# Altium PCB 2014_AlimBeaconEye.PCBDOC
Units mm, origin at the board's own origin, x right, y up, seen from the top; angles counter-clockwise.
Board outline 65.25 x 78.25 mm, 4 copper layers (1-TOP, 2-GND, 3-SIGNAL, 4-BOTTOM); 20 components, 8 nets, 37 pads, 0 vias.
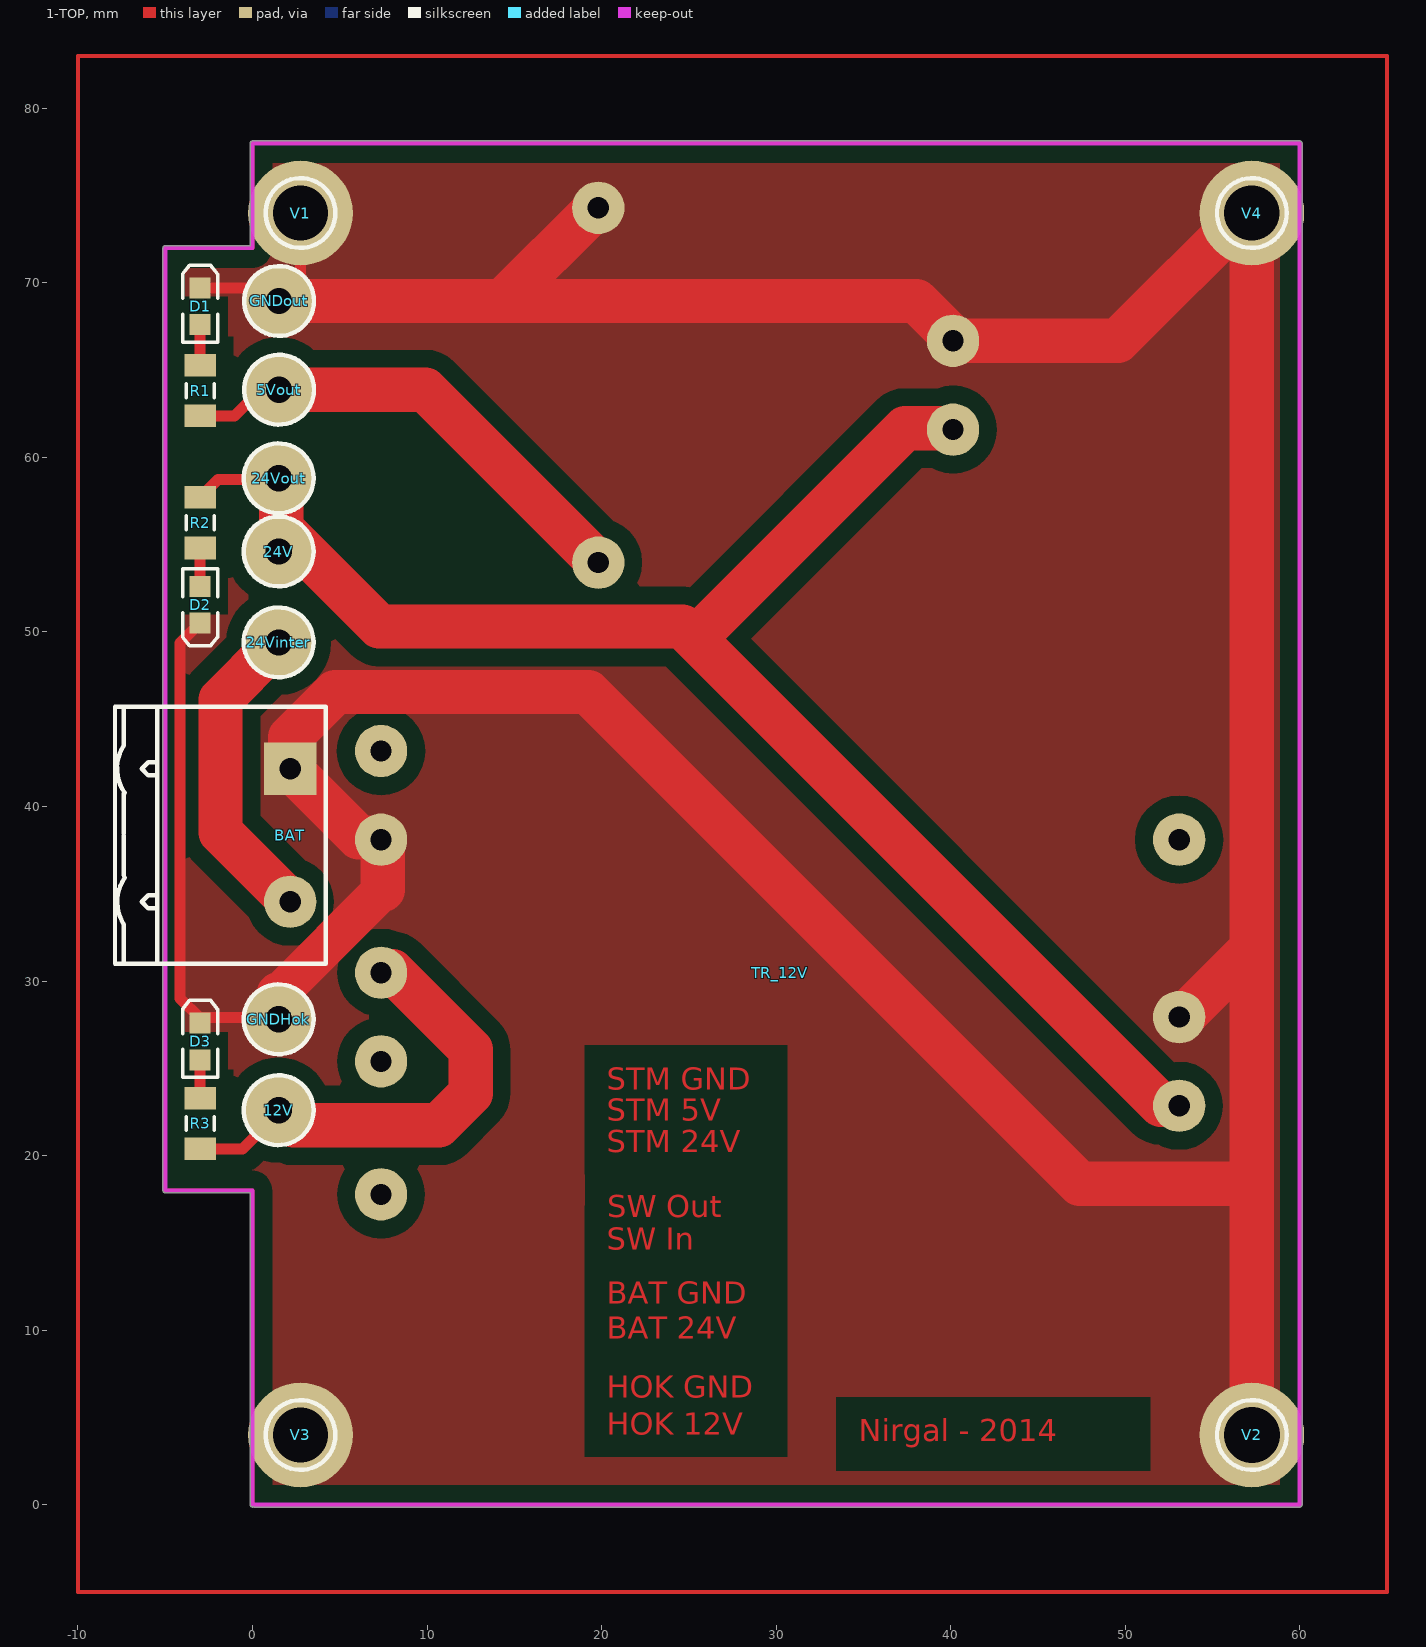
[diagram p0: 1-TOP view]
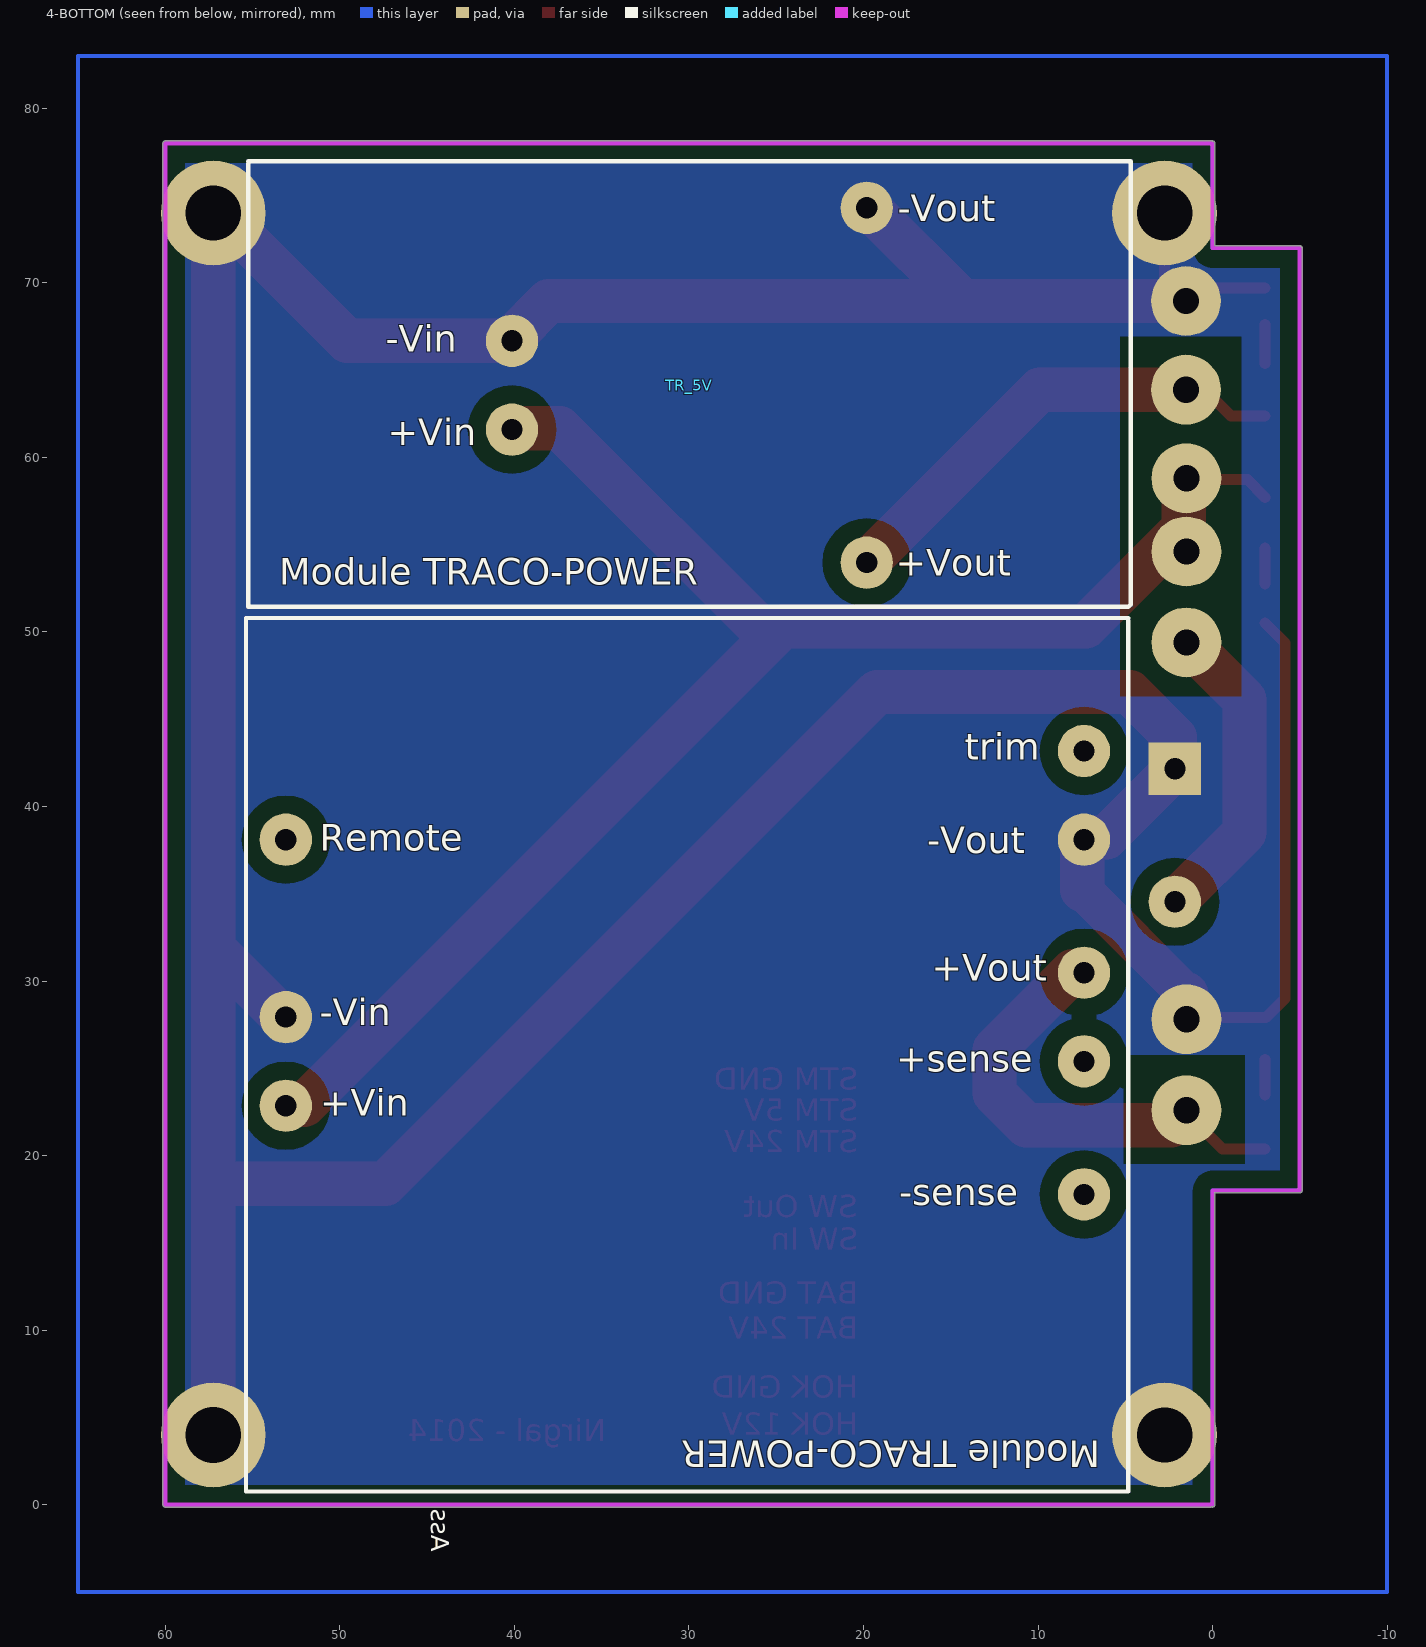
[diagram p1: 4-BOTTOM view, seen from below]
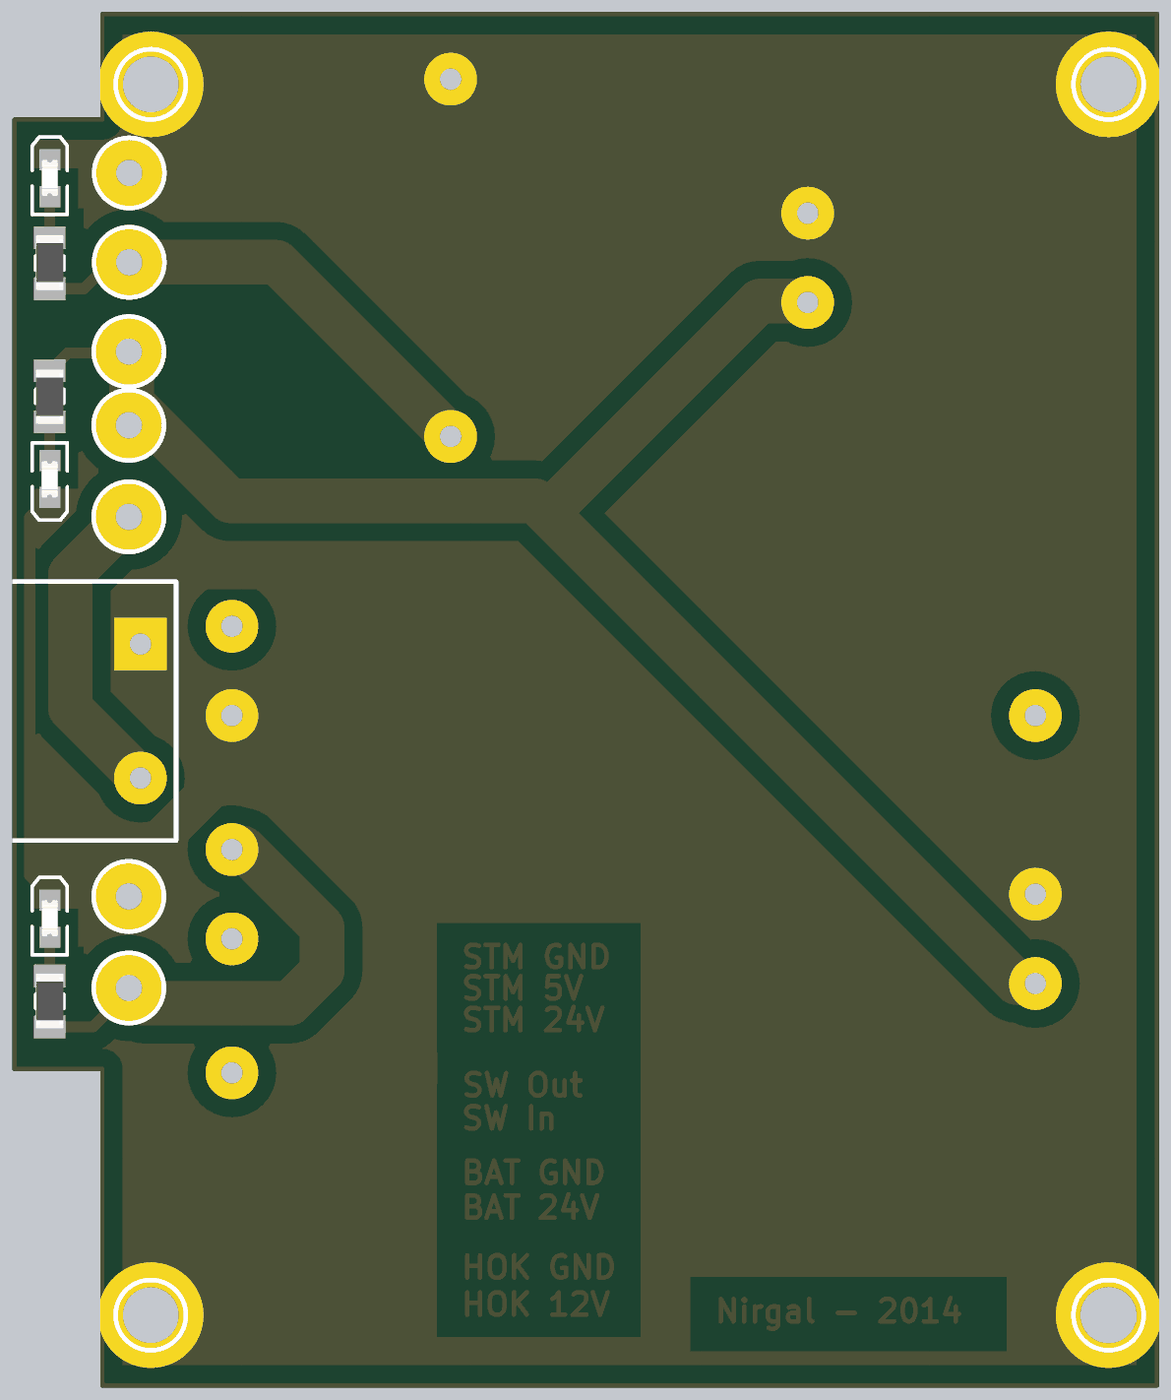
[diagram p2: 3D render of the assembled board from above, using the file's embedded part models]

## Layer stack, top to bottom
1-TOP: signal copper 0.0356
Dielectric: prepreg 0.32, FR-4, Dk 4.8
2-GND: signal copper 0.0356
Dielectric: core 0.32, FR-4, Dk 4.8
3-SIGNAL: signal copper 0.0356
Dielectric: prepreg 0.32, FR-4, Dk 4.8
4-BOTTOM: signal copper 0.0356

## Board outline
-5.127,18 ccw(c-5,18) -5,17.873 -0.127,17.873 -0.127,0 ccw(c0,0) 0.051,-0.117 ccw(c0.102,0) 0.102,-0.127 60,-0.127 ccw(c60,0) 60.127,0 60.127,78 ccw(c60,78) 60,78.127 0,78.127 ccw(c0,78) -0.127,78 -0.127,72.127 -5,72.127 ccw(c-5,72) -5.127,72

## Design rules (kind name [scope] priority, off if disabled: settings)
Clearance Clearance_1 [InNamedPolygon('4-GND') Or  InNamedPolygon('1-GND')] p1: gap=1.016
Clearance [All] p2: gap=0.381
FabricationTestPointUsage TestPointUsage [All] p1: valid=0 allowmultiple=FALSE
FabricationTestpoint Testpoint [All] p1: side=3 testpointundercomponent=TRUE minsize=1.016 maxsize=2.54 preferedsize=1.524 minholesize=0 maxholesize=1.016 preferedholesize=0.813 testpointgrid=0.025 allowsidetop=TRUE allowsidebottom=TRUE usegrid=TRUE gridtolerance=0
PlaneClearance [All] p1: clearance=0.254
PlaneConnect [All] p1: planeconnectstyle=Direct reliefexpansion=0.635 reliefentries=4 reliefconductorwidth=0.305 reliefairgap=0.381
PolygonConnect [All] p1: connectstyle=Direct reliefconductorwidth=0.254 reliefentries=4 polygonreliefangle="90 Angle"
RoomDefinition 2014_AlimBeaconEye [InComponentClass('2014_AlimBeaconEye')] p1: confinementstyle=ConfineIn formatcopy=TRUE lockcomponents=FALSE outline 79.136,0.914 299.126,0.914 299.126,54.762 79.136,54.762
RoutingLayers RoutingLayers_1 [All] p1: top layer_v5=TRUE mid layer 1_v5=FALSE mid layer 2_v5=FALSE bottom layer_v5=TRUE
RoutingLayers [All] p2: top layer_v5=TRUE mid layer 1_v5=FALSE mid layer 2_v5=FALSE bottom layer_v5=TRUE
RoutingVias [All] p1: holewidth=0.711 width=1.27 viastyle="Through Hole" minholewidth=0.711 minwidth=1.27 maxholewidth=0.711 maxwidth=1.27
SilkscreenOverComponentPads [All] p1: minsilkscreentomaskgap=0.254
SolderMaskExpansion [All] p1: expansion=0
Width [All] p1: maxlimit=3.81 minlimit=0.305 preferedwidth=0.381
22 further rules are at their usual default settings.

## Components (designator, comment, footprint, x,y, rotation, side; value= is the part's Value field where it differs from the comment)
5Vout "Pad_M3" M3x6mm#1 1.524,63.881 r0 top
12V "Pad_M3" M3x6mm#1 1.5,22.606 r0 top
24V "Pad_M3" M3x6mm#1 1.5,54.61 r0 top
24Vinter "Pad_M3" M3x6mm#1 1.5,49.403 r90 top
24Vout "Pad_M3" M3x6mm#1 1.5,58.801 r0 top
BAT "0 - 24V" BORNIER2_FEM_COUDE 2.159,42.164 r270 top
D1 "Verte" LED_0805 -3,68.656 r90 top
D2 "Orange" LED_0805 -3,51.562 r270 top
D3 "Jaune" LED_0805 -3,26.543 r90 top
GNDHok "Pad_M3" M3x6mm#1 1.5,27.813 r0 top
GNDout "Pad_M3" M3x6mm#1 1.524,68.961 r0 top
R1 "1k" R1206_N -3,63.83 r90 top
R2 "4.7k" R1206_N -3,56.261 r270 top
R3 "4.7k" R1206_N -3,21.844 r90 top
TR_5V "TRACO_Single_5V" TRACO_Single 40.132,64.135 r180 bottom
TR_12V "TRACO_12V_5A" TRACO_SIMPLE_12V_5A 4.826,50.8 r0 top
V1 "Pad_M3" M3x6mm#2 2.75,74 r0 top
V2 "Pad_M3" M3x6mm#3 57.25,4 r0 top
V3 "Pad_M3" M3x6mm#2 2.75,4 r0 top
V4 "Pad_M3" M3x6mm#2 57.25,74 r0 top

## Footprints (in the part's own frame and the unit in brackets; to place one, negate y for a bottom-side part, rotate by r counter-clockwise, add the part's x,y. Pads: shape width x height; smd on the part's side, far side on the other; paste and mask are expansions set on the pad)
BORNIER2_FEM_COUDE [mm] "Connector; Header; 2 Position; Right Angle; Female; Pin Spacing=5.08mm Green"
  rect 3x3 hole 1.219: 1(0,0)
  round 3 hole 1.219: 2(7.62,0)
  silkscreen extent -3.56,-10.03 11.18,2.03
LED_0805 [mm] "SM LED; 2 Flat Leads"
  rect 1.2x1.2 smd: 1(-1.05,0) 2(1.05,0)
  silkscreen extent -2.05,-1 2.35,1, body extent -1.05,-0.64 1.06,0.64, height 1.2
M3x6mm#1 [mm] "Vis M3 X 6mm"
  round 4 hole 1.5: 1(0,0)
  silkscreen extent -2,-2 2,2
M3x6mm#2 [mm] "Vis M3 X 6mm"
  round 6 hole 3.175: 1(0,0)
  silkscreen extent -2,-2 2,2
M3x6mm#3 [mm] "Vis M3 X 6mm"
  round 6 hole 3.2: 1(0,0)
  silkscreen extent -2,-2 2,2
R1206_N [mm] "Chip Resistor, Body 3.2x1.6mm, IPC Medium Density"
  rect 1.3x1.8 smd: 1(-1.45,0) 2(1.45,0)
  silkscreen extent -0.4,-0.8 0.4,0.8, body extent -1.68,-0.87 1.68,0.87, height 0.71
TRACO_SIMPLE_12V_5A [mm] "DoubleTRACO-POWER module"
  round 3 hole 1.219: 1(48.26,-27.94) 2(48.26,-22.86) 3(48.26,-12.7) 4(2.54,-33.02) 5(2.54,-25.4) 6(2.54,-20.32) 7(2.54,-12.7) 8(2.54,-7.62)
  body extent -0.13,-50.04 50.67,0.13
TRACO_Single [mm] "Single TRACO-POWER module"
  round 3 hole 1.219: 1(0,2.54) 2(0,-2.54) 3(20.32,10.16) 4(20.32,-10.16)
  silkscreen extent -15.11,-12.7 35.43,12.83, body extent -15.24,-12.83 35.56,12.95, height 10

## Part data
5Vout 12V 24V 24Vinter 24Vout GNDHok GNDout V1 V2 V3 V4: library part "Vis M3 X 6mm _TORX_Tête 6mm", "Vis M3 X 6mm _TORX_Tête 6mm"
BAT: library part BORNIER2, "Terminal blocks, 2 pins, pitch=5mm"
D1 D2 D3: library part LED, "Typical LED"
R1 R2 R3: library part Resistor, "Resistor"
TR_5V: library part TRACO_Single

## Nets (pads, with @x,y where several pads share a name; then routed paths per layer and width w, separated by ;. In a path a pad name is that pad's centre, name@x,y a point inside that pad or via, vN(x,y) a via of type N, cw(c..) or ccw(c..) an arc to the next point about the centre after c; other vN are vias at no path point)
5V: 5Vout.1 R1.1 TR_5V.4 | length 26.4
  1-TOP w0.635: R1.1 -1.044,62.38 5Vout.1@0.61,64.033
  1-TOP w2.54: 5Vout.1 9.906,63.881 TR_5V.4@19.609,54.178
12V: 12V.1 R3.1 TR_12V.6 | length 26.4
  1-TOP w0.635: R3.1 -0.561,20.394 12V.1@1.194,22.149
  1-TOP w2.54: 12V.1 2.364,21.742 10.668,21.742 12.497,23.571 12.497,26.06 8.001,30.556 TR_12V.6@7.442,30.556
24V: 24V.1 24Vout.1 R2.1 TR_5V.2 TR_12V.1 | length 91.9
  1-TOP w0.635: R2.1 -1.986,58.725 24Vout.1@0.965,58.725
  1-TOP w2.54: 24Vout.1@1.676,58.674 1.651,58.649 1.651,55.931 7.264,50.317 24.613,50.317 51.994,22.936 52.045,22.936 52.045,22.911 TR_12V.1@53.035,22.911 ; 25.324,49.606 37.389,61.671 TR_5V.2@40.056,61.671
24VIN: 24Vinter.1 BAT.2 | length 17.5
  1-TOP w2.54: 24Vinter.1@1.219,49.174 -1.829,46.126 -1.829,38.532 BAT.2
GND: BAT.1 D1.2 D2.2 D3.2 GNDHok.1 GNDout.1 TR_5V.1 TR_5V.3 TR_12V.2 TR_12V.7 V1.1 V2.1 V3.1 V4.1 | length 555.8
  1-TOP w0.229: 0,0 0,18 -5,18 -5,72 0,72 0,78 60,78 60,0 0.102,0 0.025,0.076 ; 0.025,77.978 0.047,78
  1-TOP w0.635: D2.2 -4.14,49.372 -4.14,29.007 -3.048,27.915 GNDHok.1@1.448,27.915 ; D1.2 1.566,69.706 GNDout.1@1.93,69.342 ; GNDout.1@1.829,69.19 2.75,70.111 V1.1
  1-TOP w2.286: GNDHok.1@1.5,29.262 7.468,35.23
  1-TOP w2.54: GNDHok.1 GNDHok.1@1.5,29.262 ; GNDout.1@1.93,68.961 14.351,68.961 ; TR_12V.7@7.341,38.227 6.096,38.227 BAT.1 2.159,43.967 4.75,46.558 19.228,46.558 47.396,18.39 56.769,18.39 ; 7.468,35.23 TR_12V.7@7.468,38.252 ; TR_5V.3@19.66,74.27 14.351,68.961 ; TR_5V.1 49.581,66.675 V4.1@57.175,74.27 ; TR_5V.1@40.132,66.853 38.024,68.961 14.351,68.961 ; TR_12V.2@53.721,28.346 57.25,31.875 ; V2.1@55.953,3.708 57.25,5.005 57.25,31.875 ; V4.1 57.25,31.875
NetD1_1: D1.1 R1.2 | length 2.2
  1-TOP w0.635: R1.2@-3,65.377 D1.1
NetD2_1: D2.1 R2.2 | length 2.1
  1-TOP w0.635: D2.1@-3,52.759 R2.2
NetD3_1: D3.1 R3.2 | length 2
  1-TOP w0.635: R3.2@-3,23.472 D3.1
pads on no net: TR_12V.3 TR_12V.4 TR_12V.5 TR_12V.8
copper on no net: | length 938
  1-TOP w0.229: -10,-5 -10,83 65,83 65,-5 -10,-5
  4-BOTTOM w0.229: 0,0 0,18 -5,18 -5,72 0,72 0,78 60,78 60,0 0.102,0 0.025,0.076 ; 0.025,77.978 0.047,78 ; -10,-5 -10,83 65,83 65,-5 -10,-5

## Polygon pours and split planes (outlines as drawn)
GND on 4-BOTTOM "4-GND" (solid, remove dead copper, pour order 1003): -5.004,78.003 59.995,78.003 59.995,0 -5.004,0
GND on 1-TOP "1-GND" (solid, remove dead copper, pour order 1001): -4.978,78.003 60.046,78.003 60.046,0 -4.978,0

## Keep-outs
Keep-Out Layer:
  lines w0.254: 0,0 0,18 -5,18 -5,72 0,72 0,78 60,78 60,0 0.102,0 0.025,0.076 ; 0.025,77.978 0.047,78

## Other copper
1-TOP:
  pour cut-out: 30.632,2.743 19.063,2.743 19.063,26.314 30.632,26.314
  text "STM GND" at 20.295,23.774 h1.27
  text "STM 5V" at 20.295,21.996 h1.27
  text "STM 24V" at 20.295,20.193 h1.27
  text "SW Out" at 20.32,16.485 h1.27
  text "SW In" at 20.295,14.605 h1.27
  text "BAT GND" at 20.295,11.506 h1.27
  text "BAT 24V" at 20.295,9.525 h1.27
  text "HOK GND" at 20.295,6.121 h1.27
  text "HOK 12V" at 20.295,4.013 h1.27
  text "Nirgal - 2014" at 34.722,3.632 h1.27
4-BOTTOM:
  pour cut-out: 5.093,19.545 -1.841,19.545 -1.841,25.756 5.093,25.756
  pour cut-out: 5.283,46.304 -1.651,46.304 -1.651,66.904 5.283,66.904

## Silkscreen, mask and mechanical layers (free items; w line width, h text height)
Bottom Overlay:
  text "Ass" at 44.764,-2.693 h1.02 r90

## Dimensions
-5,18 to 0,0 on Mechanical 15
0,78 to -5,72 on Mechanical 15
-5,72 to -5,18 on Mechanical 15
-5,18 to 0.102,0 on Mechanical 15
0,0 to 60,0 on Mechanical 15
57.25,4 to 60,0 on Mechanical 15
60,0 to 57.25,4 on Mechanical 15
60,0 to 60,78 on Mechanical 15
57.25,4 to 57.25,74 on Mechanical 15
2.75,4 to 57.25,4 on Mechanical 15

## Text inside footprints (layer, text, board x,y; h text height)
TR_5V: Bottom Overlay "+Vout" at 18.161,53.213 h1.52; Bottom Overlay "-Vout" at 18.034,73.533 h1.52; Bottom Overlay "+Vin" at 47.244,60.706 h1.52; Bottom Overlay "-Vin" at 47.371,66.04 h1.52; Bottom Overlay "Module TRACO-POWER" at 53.467,52.705 h1.52
TR_12V: Bottom Overlay "Remote" at 51.156,37.465 h1.52; Bottom Overlay "+Vin" at 51.105,22.276 h1.52; Bottom Overlay "-Vin" at 51.156,27.483 h1.52; Bottom Overlay "Module TRACO-POWER" at 6.426,3.683 h1.52 r180; Bottom Overlay "trim" at 14.199,42.672 h1.52; Bottom Overlay "-sense" at 17.958,17.17 h1.52; Bottom Overlay "+Vout" at 16.078,30.023 h1.52; Bottom Overlay "+sense" at 18.136,24.816 h1.52; Bottom Overlay "-Vout" at 16.358,37.338 h1.52